# Altium PCB J-Link ARM OB.PcbDoc
Units mil, origin at the board's own origin, x right, y up, seen from the top; angles counter-clockwise.
Board outline 1978.53 x 797.43 mil, 2 copper layers (Top Layer, Bottom Layer); 35 components, 44 nets, 134 pads, 94 vias.
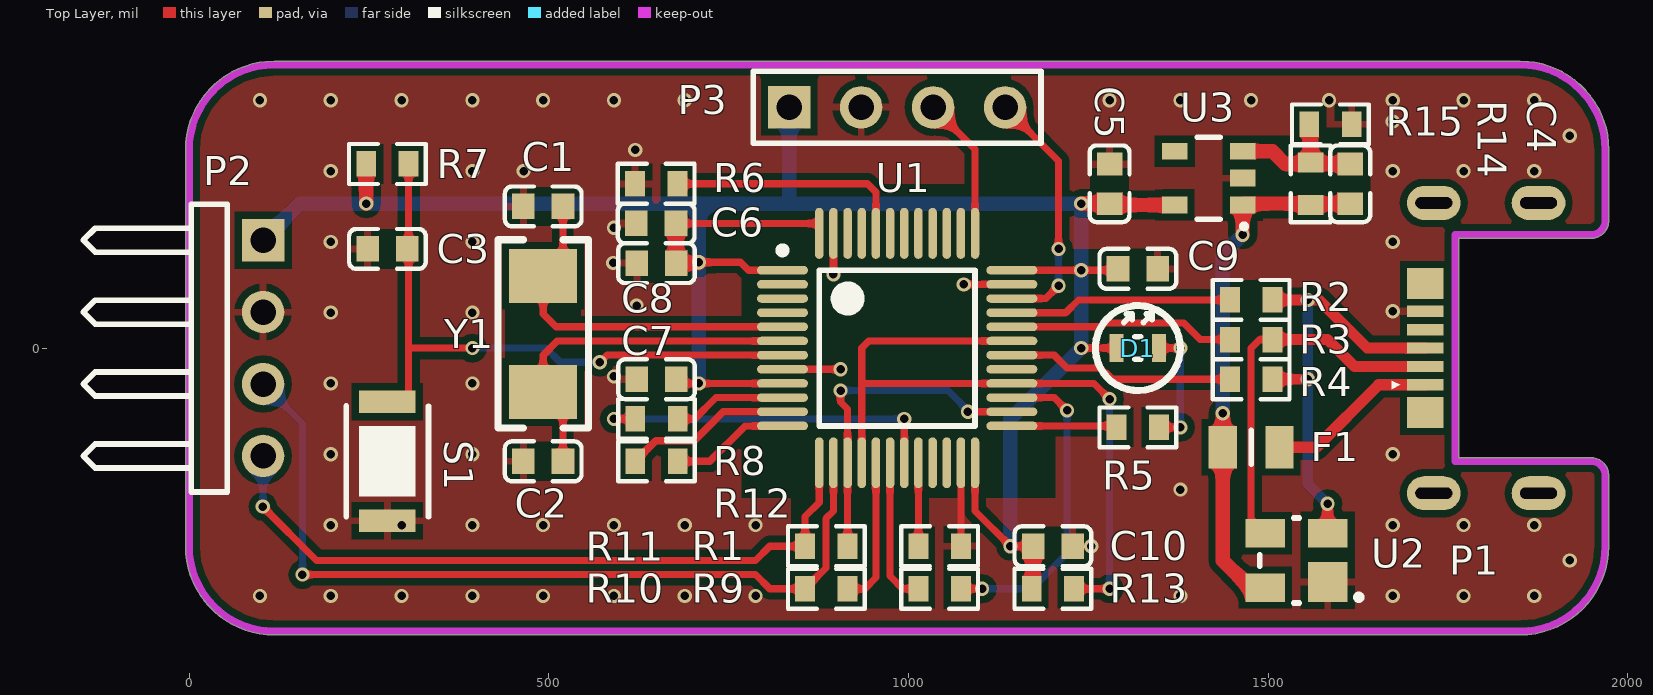
[diagram p0: Top Layer view]
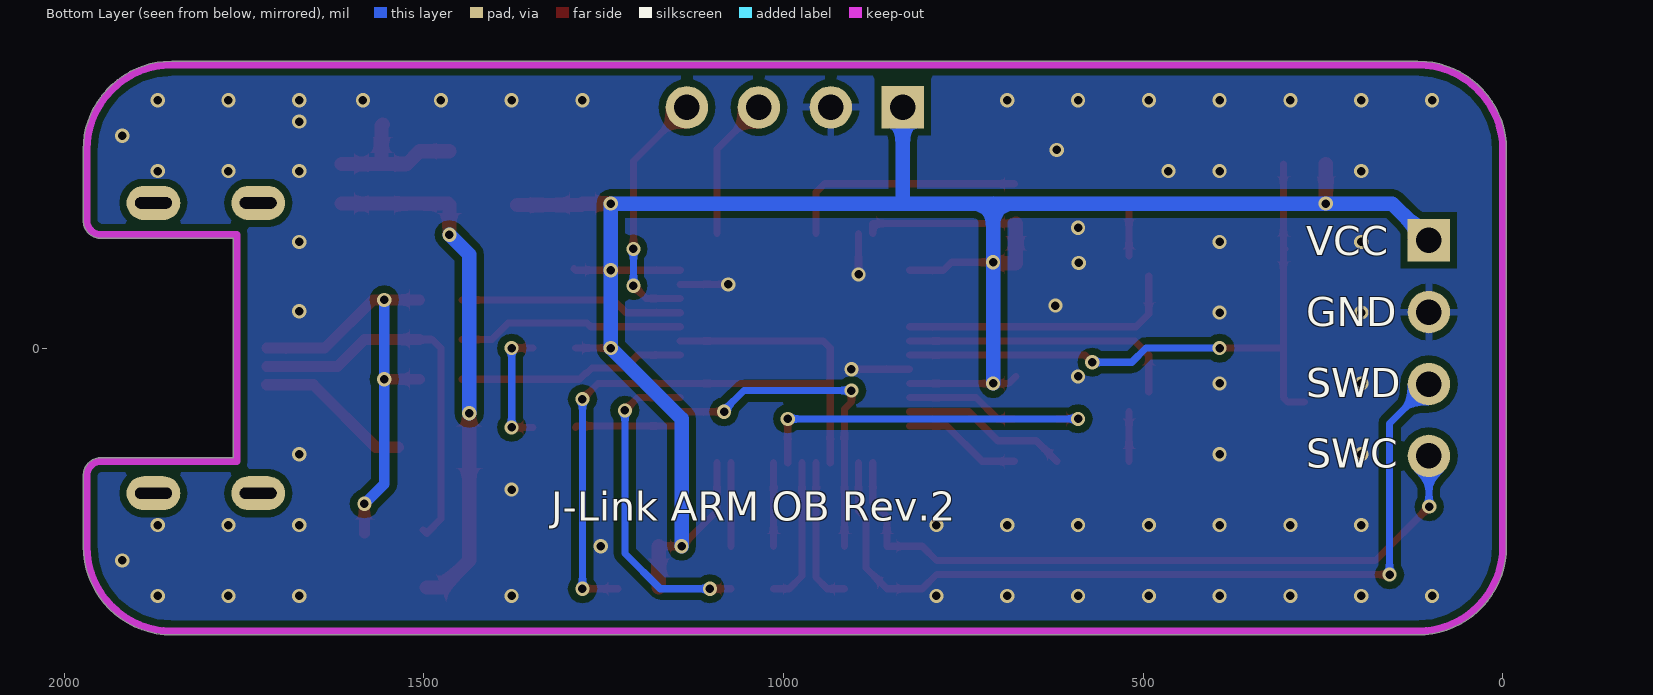
[diagram p1: Bottom Layer view, seen from below]
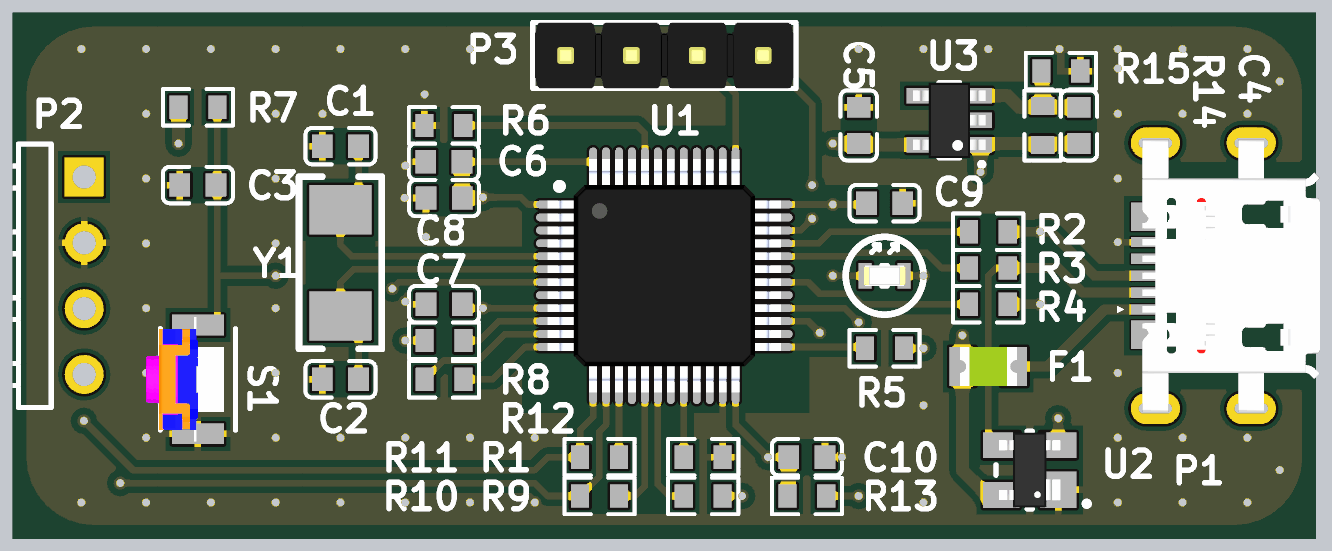
[diagram p2: 3D render of the assembled board from above, using the file's embedded part models]

## Layer stack, top to bottom
Top Solder: solder mask 0.4, Solder Resist, Dk 3.5
Top Layer: signal copper 1.4
Dielectric1: dielectric 12.6, FR-4, Dk 4.8
Bottom Layer: signal copper 1.4
Bottom Solder: solder mask 0.4, Solder Resist, Dk 3.5

## Board outline
118.11,-398.72 cw(c118.11,-275.59) -5.01,-275.59 -5.01,275.59 cw(c118.11,275.59) 118.11,398.72 1847.79,398.72 cw(c1847.79,393.7) 1849.09,398.54 cw(c1850.39,393.7) 1850.39,398.72 cw(c1850.39,275.59) 1973.52,275.59 cw(c1968.5,275.59) 1973.35,274.29 cw(c1968.5,272.98) 1973.52,272.98 1973.52,177.17 ccw(c1968.5,177.17) 1973.52,177.22 1973.52,177.17 cw(c1948.82,177.17) 1948.93,152.47 cw(c1948.82,157.48) 1948.82,152.46 1764.86,152.46 1764.86,-152.46 1948.82,-152.46 cw(c1948.82,-177.16) 1973.52,-177.16 cw(c1968.5,-177.16) 1973.52,-177.22 1973.52,-275.59 cw(c1968.5,-275.59) 1973.52,-275.62 ccw(c1850.39,-275.59) 1973.52,-275.59 1973.52,-275.62 cw(c1850.39,-275.59) 1850.39,-398.72

## Design rules (kind name [scope] priority, off if disabled: settings)
AcuteAngle [All] p1: minimum=6.00000000000000E+0001 checktracksonly=FALSE
Clearance Polygon [InPolygon] p1: gap=10 ignorepadtopadclearanceinfootprint=FALSE except(0: Arc-Hole Track-Hole SMDPad-Hole THPad-Hole Via-Hole Fill-Hole Poly-Hole Region-Hole Text-Hole)
Clearance [All] p2: gap=6 ignorepadtopadclearanceinfootprint=FALSE except(0: Arc-Hole Track-Hole SMDPad-Hole THPad-Hole Via-Hole Fill-Hole Poly-Hole Region-Hole Text-Hole)
DiffPairsRouting DiffPair_DiffPairsRouting [InDifferentialPair ('PD')] p1: maxlimit=10 minlimit=10 mostfreqgap=12.01 toplayer_minwidth=5.98 toplayer_maxwidth=15 toplayer_prefwidth=7.99 bottomlayer_minwidth=5.98 bottomlayer_maxwidth=15 bottomlayer_prefwidth=7.99 maxuncoupledlength=500
DiffPairsRouting [All] p2: maxlimit=10 minlimit=10 mostfreqgap=10 toplayer_minwidth=5.98 toplayer_maxwidth=15 toplayer_prefwidth=7.99 bottomlayer_minwidth=5.98 bottomlayer_maxwidth=15 bottomlayer_prefwidth=7.99 maxuncoupledlength=500
HoleSize [All] p1: absolutevalues=TRUE maxlimit=248.03 minlimit=7.87 maxpercent=80.000 minpercent=20.000
MatchedLengths DiffPair_MatchedLengths [InDifferentialPair ('PD')] p1: tolerance=1000 checknetsindiffpair=TRUE checkdiffpairvsdiffpair=FALSE checkxsignals=FALSE checkothers=FALSE
MinimumAnnularRing [All] p1: minimumring=3.94
MinimumSolderMaskSliver [All] p1: minsoldermaskwidth=7.09
PolygonConnect PolygonPad [IsPad] p1: connectstyle=Relief reliefconductorwidth=10 reliefentries=4 polygonreliefangle="90 Angle" airgapwidth=10
PolygonConnect PolygonVia [Isvia] p2: connectstyle=Direct reliefconductorwidth=10 reliefentries=4 polygonreliefangle="90 Angle" airgapwidth=10
PolygonConnect [All] p3: connectstyle=Direct reliefconductorwidth=10 reliefentries=4 polygonreliefangle="90 Angle" airgapwidth=10
RoomDefinition USB [False] p1: confinementstyle=ConfineOut formatcopy=TRUE lockcomponents=FALSE outline 1799.21,-196.85 1555.12,-196.85 1555.12,127.95 1799.21,127.95
RoutingVias [All] p1: holewidth=11.81 width=19.68 viastyle="Through Hole" minholewidth=11.81 minwidth=11.81 maxholewidth=248.03 maxwidth=255.91
SilkToSilkClearance [All] p1: silktosilkclearance=4
SilkToSolderMaskClearance [IsPad] p1: minsilkscreentomaskgap=7.87 clearancetoexposedcopper=TRUE
SolderMaskExpansion [All] p1: expansion=4
Width Width_VCC [InNet('VCC')] p1: maxlimit=50 minlimit=10 preferedwidth=20
Width [All] p2: maxlimit=50 minlimit=6 preferedwidth=10
25 further rules are at their usual default settings.

## Components (designator, comment, footprint, x,y, rotation, side; value= is the part's Value field where it differs from the comment)
C1 "20pF" CAP0603 492.13,196.85 r0 top
C2 "20pF" CAP0603 492.13,-157.48 r0 top
C3 "100nF" CAP0603 275.59,137.8 r0 top
C4 "1uF" CAP0603 1614.17,228.35 r270 top
C5 "1uF" CAP0603 1279.53,228.35 r270 top
C6 "100nF" CAP0603 649.21,173.23 r0 top
C7 "100nF" CAP0603 649.61,-43.31 r0 top
C8 "100nF" CAP0603 649.61,118.11 r0 top
C9 "100nF" CAP0603 1318.9,110.24 r180 top
C10 "100nF" CAP0603 1200.79,-275.59 r180 top
D1 "LED_R" 19-21 1318.9,0 r90 top
F1 "SMD0805P050TF" SMD0805P050TF 1476.38,-137.8 r0 top
P1 "A01SB1X41Bxx-051" A01SB1X41BXX-051 1834.65,0 r90 top
P2 "SWD" HDR1X4H 102.76,150 r270 top
P3 "ISP" HDR1X4 984.25,334.65 r0 top
R1 "10K" RES0603 1043.31,-275.59 r0 top
R2 "100R" RES0603 1476.38,66.93 r0 top
R3 "100R" RES0603 1476.38,11.81 r0 top
R4 "1K" RES0603 1476.38,-43.31 r0 top
R5 "100R" RES0603 1318.9,-110.24 r0 top
R6 "10K" RES0603 649.21,228.35 r0 top
R7 "10K" RES0603 275.59,255.91 r180 top
R8 "100R" RES0603 649.61,-98.42 r180 top
R9 "100R" RES0603 1043.31,-334.65 r180 top
R10 "100R" RES0603 885.82,-334.65 r180 top
R11 "100R" RES0603 885.82,-275.59 r180 top
R12 "100R" RES0603 649.61,-157.48 r0 top
R13 "1K" RES0603 1200.79,-334.65 r0 top
R14 "1M" RES0603 1559.05,228.35 r270 top
R15 "1M" RES0603 1586.61,311.02 r180 top
S1 "SW-PB" SW-SKRK-SKRKAEE010 275.59,-157.48 r270 top
U1 "STM32F103C8T6" LQFP48_N 984.25,0 r0 top
U2 "TVLS14302AC0" SOT-143-4L 1539.37,-295.28 r180 top
U3 "SGM2019-3.3YN5G" SOT23-5_L 1417.32,236.22 r180 top
Y1 "8MHz ±20ppm 20pF" SMD-5032_2P 492.13,19.68 r270 top

## Footprints (in the part's own frame and the unit in brackets; to place one, negate y for a bottom-side part, rotate by r counter-clockwise, add the part's x,y. Pads: shape width x height; smd on the part's side, far side on the other; paste and mask are expansions set on the pad)
19-21 [mm]
  rect 1x0.5 smd: 1(0,0.75) 2(0,-0.75)
  silkscreen extent -0.4,-0.5 1.2,0.5, body extent -0.4,-0.8 0.4,0.8, height 0.8
A01SB1X41BXX-051 [mm] "5-Pin SMT-Micro-B, Mid-Mount, Body 10.5 x 6.25 mm"
  oval 1.2x1.9 hole 0.4 slot 1.3 at 90 deg: 0(-5.125,-1.05) 0(-5.125,2.65) 0(5.125,-1.05) 0(5.125,2.65)
  rect 1.1x1.3 smd mask+0.051: 0(-2.275,2.95) 0(2.275,2.95)
  rect 0.4x1.3 smd mask+0.051: 1(-1.3,2.95) 2(-0.65,2.95) 3(0,2.95) 4(0.65,2.95) 5(1.3,2.95)
  silkscreen extent -1.45,3.84 -1.15,4.14, body extent -5.25,-3.7 5.25,3.15, height 2.05
CAP0603 [mm] "Chip Capacitor, Body 1.6x0.8mm, IPC High Density"
  rect 0.8x0.9 smd: 1(-0.7,0) 2(0.7,0)
  silkscreen extent -1.35,-0.7 1.35,0.7, body extent -0.8,-0.4 0.8,0.4, height 0.5
HDR1X4 [mm] "Connector; Header; 4 Position"
  rect 1.5x1.5 hole 0.9: 1(-3.81,0)
  round 1.5 hole 0.9: 2(-1.27,0) 3(1.27,0) 4(3.81,0)
  silkscreen extent -5.08,-1.27 5.08,1.27, body extent -4.99,-1.27 4.99,1.27, height 8.04
HDR1X4H [mm] "Connector; Header; 4 Position; Right Angle"
  rect 1.5x1.5 hole 0.9: 1(0,0)
  round 1.5 hole 0.9: 2(2.54,0) 3(5.08,0) 4(7.62,0)
  silkscreen extent -1.27,-6.35 8.89,-1.27
LQFP48_N [mm] "Thin QFP, 48-Leads, Body 7x7mm, Pitch 0.5mm, IPC Medium Density"
  oval 1.8x0.3 smd: 1(-4.05,2.75) 2(-4.05,2.25) 3(-4.05,1.75) 4(-4.05,1.25) 5(-4.05,0.75) 6(-4.05,0.25) 7(-4.05,-0.25) 8(-4.05,-0.75) 9(-4.05,-1.25) 10(-4.05,-1.75) 11(-4.05,-2.25) 12(-4.05,-2.75) 25(4.05,-2.75) 26(4.05,-2.25) 27(4.05,-1.75) 28(4.05,-1.25) 29(4.05,-0.75) 30(4.05,-0.25) 31(4.05,0.25) 32(4.05,0.75) 33(4.05,1.25) 34(4.05,1.75) 35(4.05,2.25) 36(4.05,2.75)
  oval 0.3x1.8 smd: 13(-2.75,-4.05) 14(-2.25,-4.05) 15(-1.75,-4.05) 16(-1.25,-4.05) 17(-0.75,-4.05) 18(-0.25,-4.05) 19(0.25,-4.05) 20(0.75,-4.05) 21(1.25,-4.05) 22(1.75,-4.05) 23(2.25,-4.05) 24(2.75,-4.05) 37(2.75,4.05) 38(2.25,4.05) 39(1.75,4.05) 40(1.25,4.05) 41(0.75,4.05) 42(0.25,4.05) 43(-0.25,4.05) 44(-0.75,4.05) 45(-1.25,4.05) 46(-1.75,4.05) 47(-2.25,4.05) 48(-2.75,4.05)
  silkscreen extent -4.17,-2.75 2.75,3.57, body extent -4.5,-4.5 4.5,4.5, height 1.5
RES0603 [mm] "Chip Resistor, Body 1.6x0.8mm, IPC High Density"
  rect 0.7x0.9 smd: 1(-0.75,0) 2(0.75,0)
  silkscreen extent -1.35,-0.7 1.35,0.7, body extent -0.8,-0.4 0.8,0.4, height 0.5
SMD0805P050TF [mm] "PTTC, 0805, Body 2.2x1.5mm"
  rect 1x1.5 smd: 1(-1,0) 2(1,0)
  silkscreen extent 0,-0.6 0,0.6, body extent -1.1,-0.75 1.1,0.75, height 0.6
SMD-5032_2P [mm]
  rect 1.9x2.4 smd: 1(-2.05,0) 2(2.05,0)
  silkscreen extent -3.32,-1.6 3.32,1.6, body extent -2.5,-1.6 2.5,1.6, height 1.2
SOT23-5_L [mm] "SOT23, 5 Pin, Body 2.9 x 2.7mm, Pitch 0.95mm, IPC High Density"
  rect 0.9x0.6 smd: 1(-1.2,0.95) 2(-1.2,0) 3(-1.2,-0.95) 4(1.2,-0.95) 5(1.2,0.95)
  silkscreen extent -1.3,-1.45 0.4,1.75, body extent -1.4,-1.45 1.4,1.45, height 1.45
SOT-143-4L [mm] "4-Pin SOT-143-4L, Body 3.0 x 2.55 mm"
  rect 1.4x1.4 smd: 1(-1.1,0.76)
  rect 1.4x1 smd: 2(-1.1,-0.96) 3(1.1,-0.96) 4(1.1,0.96)
  silkscreen extent -2.3,-1.5 1.3,1.5, body extent -1.18,-1.45 1.18,1.45, height 1.22
SW-SKRK-SKRKAEE010 [mm] "ALPS SW-SKRK-SKRKAEE010 3.9x2.9mm"
  rect 0.8x2 smd: 1(-2.1,0) 2(2.1,0)
  silkscreen extent -1.95,-1.45 1.95,1.45, body extent -2.4,-1.45 2.4,1.45, height 2.02

## Part data
C1 C2: library part "Cap 20pF/±5%/50V/0603", "0603, C0G, 20pF, ±5%, 50V, CL"
C3 C6 C7 C8 C9 C10: library part "Cap 100nF/±10%/50V/0603", "0603, X7R, 100nF, ±10%, 50V, CL"
C4 C5: library part "Cap 1uF/±10%/16V/0603", "0603, X5R, 1uF, ±10%, 16V, CL"
D1: library part LED_19-21/R7C-AN2Q1B/3T, "SMD0603 LED, 2-Pin 19-21, Pb-Free, Tape and Reel"
F1: "Over Current Protection, Resettable Fuses-PPTC, SMD0805 Series, I(hold) 0.05~1.25A"
P1: library part C40956/5P, "Micro USB, 7-Pin SMT-Micro-B, no Flange, Pitch 10.25mm"
P2: library part "Header 4H", "Header, 4-Pin, Right Angle"
P3: library part "Header 4", "Header, 4-Pin"
R1 R6 R7: library part "Res 10KΩ/±1%/0603", "10KΩ, ±1%, 0603, RC"
R2 R3 R4 R8 R9 R10 R11 R12 R13: library part "Res 100Ω/±1%/0603", "100Ω, ±1%, 0603, RC"
R5: library part "Res 100Ω/±5%/0603", "100Ω, ±5%, 0603, RC"
R14 R15: library part "Res 1MΩ/±5%/0603", "1MΩ, ±5%, 0603, RC"
S1: "Switch"
U1: "STM32 ARM-based 32-bit MCU with 64 Kbytes Flash, 48-pin LQFP, Industrial Temperature"
U2: library part TVS_TVLS14302AC0, "Multi-Line TVS Array, 4-Pin SOT-143-4L, Pb-Free, Tape and Reel"
U3: "Single Output LDO, 300 mA, 3.3V Fixed Out, 2.5 to 5.5 V Input, 5-Pin SOT-23"
Y1: library part "SMD-5032_2P 8MHz 20ppm 20pF", "贴片晶振"

## Via types
v1: diameter 19.68, hole 11.81, Top Layer to Bottom Layer, tented both sides, 94 vias

## Nets (pads, with @x,y where several pads share a name; then routed paths per layer and width w, separated by ;. In a path a pad name is that pad's centre, name@x,y a point inside that pad or via, vN(x,y) a via of type N, cw(c..) or ccw(c..) an arc to the next point about the centre after c; other vN are vias at no path point)
BOOT0: R6.2 U1.44 | length 338
  Top Layer w10: R6.2 942.91,228.35 954.72,216.54 U1.44
BOOT1: R1.1 U1.20 | length 116.1
  Top Layer w10: R1.1 U1.20
GND: C1.1 C2.1 C3.1 C5.1 C6.1 C7.1 C8.1 C9.1 C10.1 P1.5 P2.2 P3.2 R1.2 R6.1 R15.1 S1.2 U1.8 U1.23 U1.35 U1.47 U2.1 U3.2 | length 320.9
  Top Layer w10: U1.8 v1(905.51,-29.53) ; v1(895.67,102.36) U1.47 ; R1.2 U1.23 ; v1(1076.77,88.58) U1.35
  other v1: 98.43,-344.49 196.85,-344.49 295.28,-344.49 393.7,-344.49 492.13,-344.49 590.55,-344.49 688.98,-344.49 787.4,-344.49 1377.95,-344.49 1673.23,-344.49 1771.65,-344.49 1870.08,-344.49 1919.29,-295.28 1254.09,-275.59 196.85,-246.06 295.28,-246.06 393.7,-246.06 492.13,-246.06 590.55,-246.06 688.98,-246.06 787.4,-246.06 1673.23,-246.06 1771.65,-246.06 1870.08,-246.06 1377.95,-196.85 196.85,-147.64 393.7,-147.64 1673.23,-147.64 196.85,-49.21 393.7,-49.21 590.55,-39.37 196.85,49.21 393.7,49.21 1673.23,51.18 622.05,59.06 589.53,118.3 196.85,147.64 393.7,147.64 1673.23,147.64 590.55,167.32 196.85,246.06 393.7,246.06 465,246 1673.23,246.06 1771.65,246.06 1870.08,246.06 620.08,275.59 1919.29,295.28 1673.23,314.96 98.43,344.49 196.85,344.49 295.28,344.49 393.7,344.49 492.13,344.49 590.55,344.49 688.98,344.49 1279.53,344.49 1377.95,344.49 1476.38,344.49 1584.65,344.49 1673.23,344.49 1771.65,344.49 1870.08,344.49
H1: U1.39
H2: U1.40
H3: U1.41
H4: U1.45
H5: U1.46
H6: U1.21
H7: U1.22
H8: U1.2
H9: U1.3
H10: U1.4
IIC_SCL: U1.42
IIC_SDA: U1.43
JTCK: P3.3 U1.37 | length 199.3
  Top Layer w10: P3.3 1092.52,276.38 U1.37
JTMS: P3.4 U1.34 | length 351.2
  Top Layer w10: P3.4 1208.66,260.24 v1(1208.66,137.8) ; U1.34 1190.94,68.9 v1(1208.66,86.61)
  Bottom Layer w10: v1(1208.66,86.61) v1(1208.66,137.8)
LED: R5.1 U1.25 | length 146.5
  Top Layer w10: U1.25 1287.4,-108.27 R5.1
NetC4_1: C4.1 R14.1 R15.2 U3.3 | length 210.9
  Top Layer w19.68: U3.3 1505.91,273.62 1523.62,255.91 C4.1 ; R15.2 1559.05,309.06 R14.1
NetD1_2: D1.2 R5.2 | length 169.3
  Top Layer w10: R5.2 v1(1377.95,-110.24) ; D1.2 v1(1377.95,0)
  Bottom Layer w10: v1(1377.95,-110.24) v1(1377.95,0)
NetF1_2: F1.2 P1.1 | length 218.9
  Top Layer w15.75: F1.2@1535.43,-137.8 1566.93,-137.8 1653.54,-51.18 P1.1
NetP1_2: P1.2 R3.2 U2.3 | length 534.8
  Top Layer w10: U2.3@1500.75,-252.8 U2.3 1476.38,-237.8 1476.38,0 1488.19,11.81 R3.2
  Top Layer w15: R3.2 1582.68,11.81 1620.08,-25.59 P1.2
NetP1_3: P1.3 R2.2 R4.2 U2.2 | length 625.4
  Top Layer w15: R4.2 v1(1555.12,-43.31) ; R2.2 1570.87,66.93 1637.8,0 P1.3 ; U2.2 v1(1582.68,-216.54)
  Bottom Layer w15: v1(1555.12,66.93) v1(1555.12,-43.31) 1555.12,-188.98 v1(1582.68,-216.54)
NRST: C3.2 R7.1 S1.1 U1.7 | length 891.5
  Top Layer w10: S1.1 299.21,-74.8 305.12,-68.9 305.12,9.85 C3.2@305.12,139.76 ; C3.2 C3.2@305.12,139.76 ; 305.12,0 v1(393.7,0) ; R7.1 C3.2@305.12,139.76 ; v1(570.87,-19.68) 580.71,-9.84 U1.7
  Bottom Layer w10: v1(393.7,0) 496.06,0 515.75,-19.68 v1(570.87,-19.68)
OSC_IN: C1.2 U1.5 Y1.1 | length 462.1
  Top Layer w10: Y1.1 492.13,47.24 509.84,29.53 U1.5 ; Y1.1@519.69,127.95 C1.2
OSC_OUT: C2.2 U1.6 Y1.2 | length 460.9
  Top Layer w10: Y1.2 492.13,-9.84 511.81,9.84 U1.6 ; C2.2 Y1.2@519.69,-88.58
PA8: U1.29
PA15: U1.38
TCKIN: P2.4 R11.2 U1.13 | length 988.2
  Top Layer w10: v1(102.36,-220.47) 177.17,-295.28 787.4,-295.28 807.09,-275.59 R11.2 856.3,-234.25 875.98,-214.57 U1.13
  Bottom Layer w10: v1(102.36,-220.47) 102.76,-220.47 P2.4
TCKOUT: R11.1 U1.15 U1.26 | length 472.2
  Top Layer w10: v1(905.51,-59.06) 905.51,-74.8 915.35,-84.65 U1.15 R11.1 ; v1(1082.68,-88.58) U1.26
  Bottom Layer w10: v1(905.51,-59.06) 1055.12,-59.06 1082.68,-86.61 v1(1082.68,-88.58)
TDIIN: R9.2 U1.18 | length 204.2
  Top Layer w10: U1.18 974.41,-316.93 992.13,-334.65 R9.2
TDIOUT: R9.1 U1.27 | length 451
  Top Layer w10: R9.1 v1(1102.36,-334.65) ; U1.27 1202.76,-68.9 v1(1220.47,-86.61)
  Bottom Layer w10: v1(1102.36,-334.65) 1171.26,-334.65 1220.47,-285.43 v1(1220.47,-86.61)
TDOIN: R13.2 U1.16 U1.28 U1.31 | length 1039.5
  Top Layer w10: U1.16 935.04,-47.24 ; U1.31 1062.99,9.84 944.88,9.84 935.04,0 935.04,-47.24 ; R13.2 v1(1279.53,-334.65) ; v1(1279.53,-70.87) 1257.87,-49.21 U1.28 937.01,-49.21 935.04,-47.24
  Bottom Layer w10: v1(1279.53,-334.65) v1(1279.53,-70.87)
TMSIN: P2.3 R10.2 U1.14 | length 1186.1
  Top Layer w10: v1(157.48,-314.96) 787.4,-314.96 807.09,-334.65 R10.2 885.29,-305.65 885.29,-236.75 895.67,-226.38 U1.14
  Bottom Layer w10: P2.3 157.48,-104.72 v1(157.48,-314.96)
TMSOUT: R10.1 U1.17 | length 205.4
  Top Layer w10: R10.1 939.13,-334.65 954.72,-319.05 U1.17
TREOUT: R12.1 U1.11 | length 233.3
  Top Layer w10: R12.1 648.8,-128.76 702.29,-128.76 742.47,-88.58 U1.11
TRESIN: R12.2 U1.12 | length 166.1
  Top Layer w10: R12.2 723.7,-157.48 772.91,-108.27 U1.12
TRSTIN: R8.2 U1.19 | length 494.1
  Top Layer w10: v1(590.55,-98.43) R8.2 ; U1.19 v1(994.09,-98.43)
  Bottom Layer w10: v1(590.55,-98.43) v1(994.09,-98.43)
TRSTOUT: R8.1 U1.10 | length 157.9
  Top Layer w10: R8.1 702.92,-98.42 732.44,-68.9 U1.10
USB_EN: R4.1 U1.30 | length 317
  Top Layer w10: U1.30 1202.76,-9.84 1220.47,-27.56 1266.19,-27.56 1273.31,-34.69 1274.84,-34.69 1283.46,-43.31 R4.1
USBD+: R2.1 U1.33 | length 310.5
  Top Layer w10: U1.33 1218.5,49.21 1236.22,66.93 R2.1
USBD-: R3.1 U1.32 | length 314.8
  Top Layer w10: U1.32 1268.16,29.53 1273.31,34.69 1382.64,34.69 1405.51,11.81 R3.1
VBUS: C4.2 F1.1 R14.2 U2.4 U3.1 | length 730.6
  Top Layer w19.68: v1(1437.01,-90.55) F1.1 1437.01,-295.28 1474.8,-333.07 U2.4 ; v1(1464.57,157.48) U3.1 1466.54,200.79 C4.2
  Bottom Layer w19.68: v1(1437.01,-90.55) 1437.01,129.92 v1(1464.57,157.48)
VCC: C5.2 C6.2 C7.2 C8.2 C9.2 C10.2 D1.1 P2.1 P3.1 R7.2 R13.1 U1.1 U1.9 U1.24 U1.36 U1.48 U3.5 | length 3243.1
  Top Layer w10: C6.2 875.98,173.23 U1.48 ; C7.2@677.17,-39.37 687.01,-49.21 v1(708.66,-49.21) U1.9 ; v1(708.66,119.27) 766.56,119.27 777.56,108.27 U1.1 ; U1.24 1092.52,-226.38 v1(1141.73,-275.59) C10.2 ; U1.36 v1(1240.16,108.27) 1289.37,108.27 C9.2 ; R13.1 R13.1@1173.23,-332.68 ; v1(1240.16,0) D1.1
  Top Layer w20: v1(246.06,200.79) R7.2 ; C6.2 676.77,118.5 C8.2 707.5,118.11 v1(708.66,119.27) ; R13.1@1173.23,-332.68 C10.2 ; v1(1240.16,200.79) C5.2 1281.5,198.82 U3.5
  Bottom Layer w20: P2.1 153.54,200.79 v1(246.06,200.79) 708.66,200.79 ; v1(708.66,-49.21) v1(708.66,119.27) 708.66,200.79 ; 834.25,201.18 P3.1 ; v1(1141.73,-275.59) 1141.73,-98.43 v1(1240.16,0) v1(1240.16,108.27) v1(1240.16,200.79) 708.66,200.79
pads on no net: P1.0 P1.4 U3.4

## Polygon pours and split planes (outlines as drawn)
GND on Top Layer "Top Layer-No Net" (solid, remove dead copper, pour order 2): -49.21,442.91 1968.5,442.91 1968.5,-442.91 -49.21,-442.91
GND on Bottom Layer "Top Layer-No Net" (solid, remove dead copper, pour order 4): -49.21,442.91 1968.5,442.91 1968.5,-442.91 -49.21,-442.91

## Keep-outs
Keep-Out Layer:
  lines w10: 1847.79,393.7 118.11,393.7 ccw(c118.11,275.59) 0,275.59 0,-275.59 ccw(c118.11,-275.59) 118.11,-393.7 1850.39,-393.7 ccw(c1850.39,-275.59) 1968.5,-275.59 1968.5,-177.16 ccw(c1948.82,-177.16) 1948.82,-157.48 1759.84,-157.48 1759.84,157.48 1948.82,157.48 ccw(c1948.82,177.17) 1968.5,177.17 1968.5,272.98 ; 1850.39,393.7 cw(c1850.39,275.59) 1968.5,275.59

## Other copper
Top Layer:
  pour cut-out: 767.72,228.35 1204.72,228.35 1204.72,-208.66 767.72,-208.66
  pour cut-out: 939.13,-362.36 990,-362.36 990,-352.49 964.5,-326.99 962.97,-326.99 962.96,-326.99
  pour cut-out: 438.88,56.99 438.88,-20.23 478.3,-20.23 501.39,2.86 501.39,36.51 480.91,56.99
  pour cut-out: 1470.63,94.65 1482.13,94.65 1482.13,-64.93 1479.85,-67.2 1474.18,-67.2 1470.63,-63.65
  pour cut-out: 1265.59,137.8 1265.43,137.95 1224.78,137.95 1224.78,125.35 1226.57,123.56 1265.59,123.56
  pour cut-out: 1592.36,306.02 1580.87,306.02 1580.87,283.31 1592.36,283.31
  pour cut-out: 1492.28,295.43 1533.31,295.43 1533.31,283.62 1529.92,280.23 1527.91,280.23
  pour cut-out: 545.37,56.99 545.37,41.24 545.87,40.74 514.49,40.74 514.49,45.85 503.34,56.99
  pour cut-out: 545.37,-17.62 545.37,-2.06 543.31,0 541.93,-1.37 516.46,-1.37 516.46,-2.62 505.57,-13.5 507.28,-15.21 507.28,-17.62
  pour cut-out: 596.3,-71.02 596.3,-81.63 596.94,-82.27 600.3,-78.91 600.3,-74.71
  pour cut-out: 600.3,-133.76 600.3,-122.14 633.03,-122.14 627.94,-127.23 627.94,-133.76
  pour cut-out: 836.52,-251.88 836.52,-210.73 850.39,-196.85 856.92,-203.38 856.92,-213.28
  pour cut-out: 880.08,-362.36 891.57,-362.36 891.57,-321.77 888.7,-321.77 881.89,-314.96 874.01,-322.84 874.01,-334.65
  pour cut-out: 655.02,149.51 655.02,135.36 655.3,135.09 658.4,138.19 658.4,146.07

## Silkscreen, mask and mechanical layers (free items; w line width, h text height)
Top Overlay:
  circle w10: c1318.9,0 r59.06
Bottom Overlay:
  text "VCC" at 273.32,128.73 h40
  text "GND" at 273.32,30.35 h40
  text "SWD" at 273.32,-68.03 h40
  text "SWC" at 273.32,-166.42 h40
  text "J-Link ARM OB Rev.2" at 1322.83,-240.16 h40